# Altium PCB board.PcbDoc
Units mm, origin at the board's own origin, x right, y up, seen from the top; angles counter-clockwise.
Board outline 135 x 110 mm, 2 copper layers (Top Layer, Bottom Layer); 102 components, 97 nets, 393 pads, 98 vias.
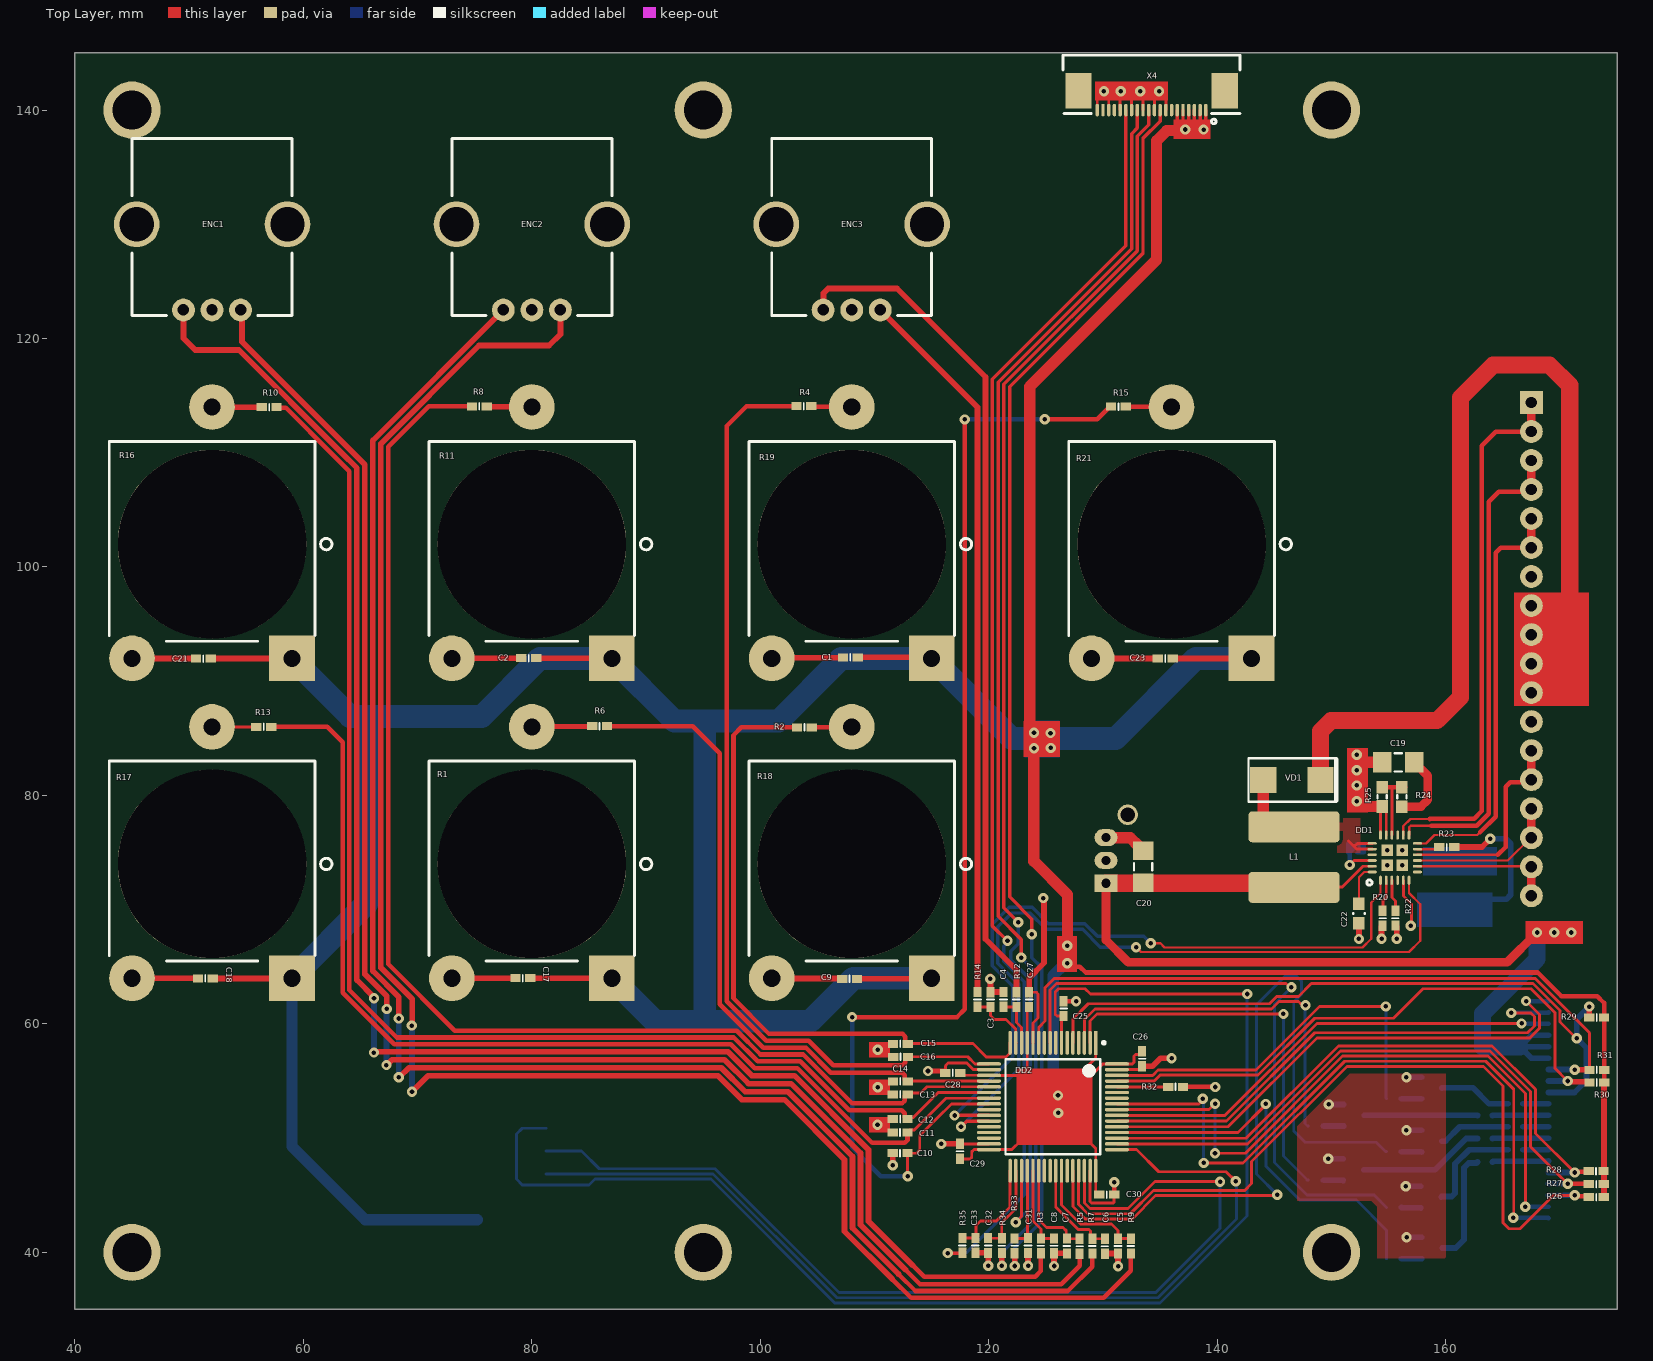
[diagram p0: Top Layer view]
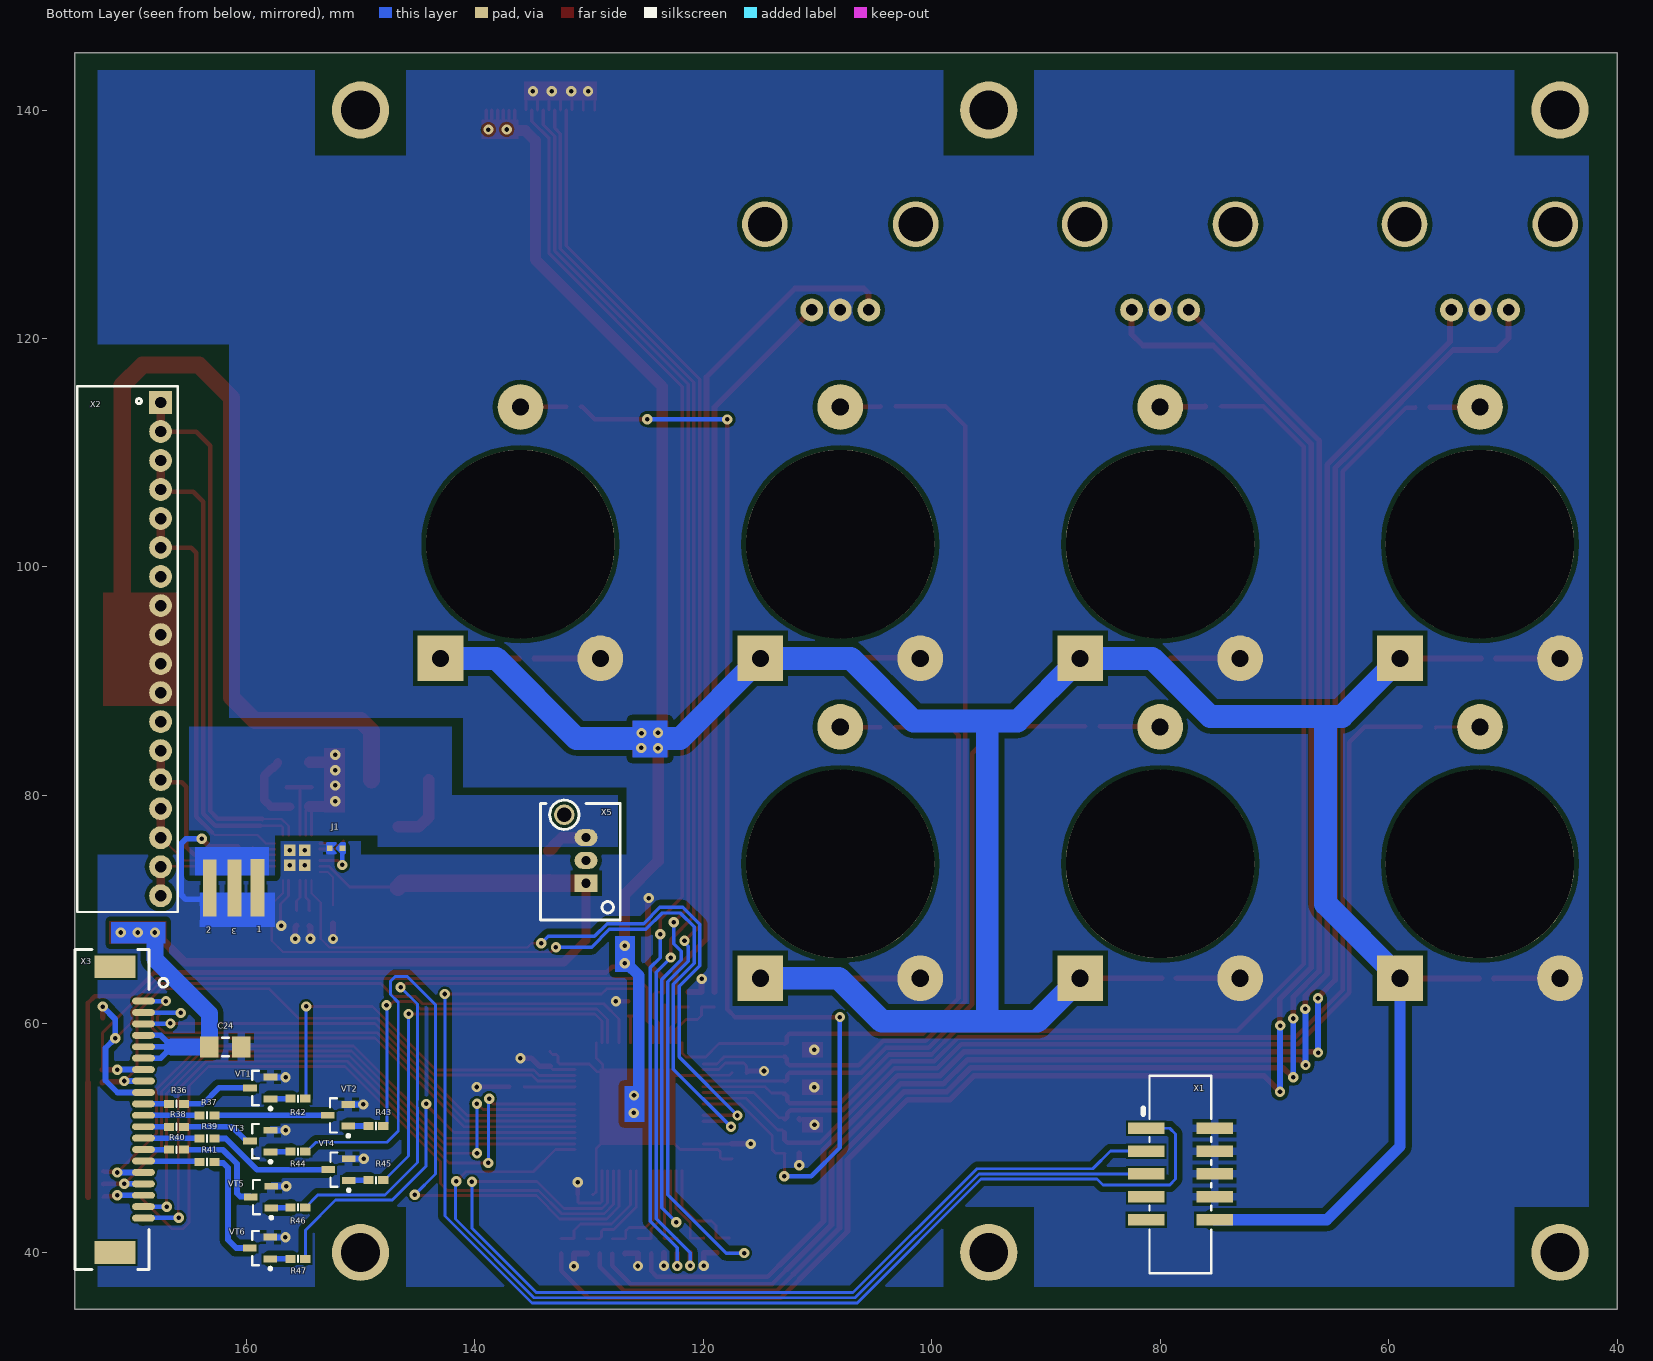
[diagram p1: Bottom Layer view, seen from below]

## Layer stack, top to bottom
Top Solder: solder mask 0.0102, Solder Resist, Dk 3.5
Top Layer: signal copper 0.0356
Dielectric 1: dielectric 0.32, FR-4, Dk 4.8
Bottom Layer: signal copper 0.0356
Bottom Solder: solder mask 0.0102, Solder Resist, Dk 3.5

## Board outline
40,35 175,35 175,145 40,145

## Design rules (kind name [scope] priority, off if disabled: settings)
Clearance Clearance_1 [InComponent('J1')] p1: gap=0.1 ignorepadtopadclearanceinfootprint=FALSE
Clearance [All] p2: gap=0.2 ignorepadtopadclearanceinfootprint=FALSE except(0: Arc-Hole Track-Hole SMDPad-Hole THPad-Hole Via-Hole Fill-Hole Poly-Hole Region-Hole Text-Hole; 0.4: THPad-Poly; 0.5: Track-Poly Fill-Poly Poly-Poly)
ComponentClearance [All] p1: gap=0.6 collisioncheckmode=3 verticalgap=0.254 showdistances=FALSE
Height [All] p1: minheight=0 maxheight=50 prefheight=30.7
HoleSize [All] p1: absolutevalues=TRUE maxlimit=20 minlimit=0.2 maxpercent=80.000 minpercent=20.000
HoleToHoleClearance [All] p1: gap=0.5 allowstackedmicrovias=TRUE
MinimumSolderMaskSliver [All] p1: minsoldermaskwidth=0.1
PlaneClearance [All] p1: clearance=0.3
PlaneConnect [All] p1: planeconnectstyle=Relief reliefexpansion=0.5 reliefentries=4 reliefconductorwidth=0.4 reliefairgap=0.3
PolygonConnect PolygonConnect_1 [All vs IsVia or IsPadHoleValid] p1: connectstyle=Direct reliefconductorwidth=0.254 reliefentries=4 polygonreliefangle="90 Angle" airgapwidth=0.254
PolygonConnect [All] p2: connectstyle=Relief reliefconductorwidth=0.7 reliefentries=4 polygonreliefangle="90 Angle" airgapwidth=0.3
RoutingCorners [All] p1: cornerstyle=45-Degree minsetback=2 maxsetback=2
RoutingVias [All] p1: holewidth=0.3 width=0.7 viastyle="Through Hole" minholewidth=0.3 minwidth=0.7 maxholewidth=1 maxwidth=2
SilkToSilkClearance [All] p1: silktosilkclearance=0.1
SilkToSolderMaskClearance [IsPad] p1: minsilkscreentomaskgap=0.05 clearancetoexposedcopper=TRUE
SolderMaskExpansion [All] p1: expansion=0.05 istentingtop=FALSE
Width [All] p1: maxlimit=3 minlimit=0.2 preferedwidth=0.3
20 further rules are at their usual default settings.

## Components (designator, comment, footprint, x,y, rotation, side; value= is the part's Value field where it differs from the comment)
1 "Wire Bridge" "Bridge 1.2mm" 159.02,73.17 r270 bottom net-tie
2 "Wire Bridge" "Bridge 1.2mm" 163.21,73.15 r270 bottom net-tie
3 "Wire Bridge" "Bridge 1.2mm" 161.03,73.16 r270 bottom net-tie
C1 "Cap" C0402 107.88,92.09 r0 top value=0.1
C2 "Cap" C0402 79.73,92.02 r0 top value=0.1
C3 "Cap" C0402 120.15,62.13 r90 top value=0.1
C4 "Cap" C0402 121.29,62.14 r90 top value=0.1
C5 "Cap" C0402 131.31,40.55 r270 top value=0.1
C6 "Cap" C0402 130.17,40.54 r270 top value=0.1
C7 "Cap" C0402 126.84,40.56 r270 top value=0.1
C8 "Cap" C0402 125.71,40.57 r270 top value=0.1
C9 "Cap" C0402 107.81,63.95 r0 top value=0.1
C10 "Cap" C0402 112.233,48.681 r180 top value=0.1
C11 "Cap" C0402 112.233,50.491 r180 top value=0.1
C12 "Cap" C0402 112.243,51.673 r180 top value=0.1
C13 "Cap" C0402 112.253,53.841 r180 top value=0.1
C14 "Cap" C0402 112.26,54.968 r180 top value=0.1
C15 "Cap" C0402 112.28,57.12 r180 top value=0.1
C16 "Cap" C0402 112.26,58.25 r180 top value=0.1
C17 "Cap" C0402 79.21,64 r0 top value=0.1
C18 "Cap" C0402 51.42,63.98 r0 top value=0.1
C19 "Cap" C1206 155.85,82.9 r180 top value=10
C20 "Cap" C1206 133.52,73.76 r270 top value=10
C21 "Cap" C0402 51.24,91.98 r0 top value=0.1
C22 "Cap" C0603 152.402,69.667 r180 top value=1
C23 "Cap" C0402 135.45,91.99 r0 top value=0.1
C24 "Cap" C1206 161.83,57.98 r0 bottom value=10
C25 "Cap" C0402 126.558,61.34 r270 top value=0.1
C26 "Cap" C0402 133.42,56.95 r270 top value=4.7
C27 "Cap" C0402 123.54,62.13 r90 top value=0.1
C28 "Cap" C0402 116.85,55.71 r180 top value=0.1
C29 "Cap" C0402 117.48,48.854 r90 top value=0.1
C30 "Cap" C0402 130.324,45.051 r0 top value=0.1
C31 "Cap" C0402 123.43,40.6 r270 top value=560pF
C32 "Cap" C0402 119.95,40.6 r270 top value=560pF
C33 "Cap" C0402 118.82,40.61 r270 top value=560pF
DD1 "WLED Boost" WQFN-24 154.29,72.575 r90 top
DD2 "STM32F072Rx" LQFP64_M 125.618,52.746 r270 top locked
ENC1 "PEC11R" PEC11R 52,122.5 r0 top locked
ENC2 "PEC11R" PEC11R 80,122.5 r0 top locked
ENC3 "PEC11R" PEC11R 108,122.5 r0 top locked
J1 "JumperB" SM/JUMPER_SHORT 152.777,75.382 r180 bottom
L1 "IND2" SDR0805 146.72,74.6 r90 top value="10uH 2A"
R1 "Res" P16NP_16mm 87,64 r90 top locked
R2 "Res" R0402 103.86,85.96 r180 top value=10K
R3 "Res" R0402 124.56,40.57 r90 top value=10K
R4 "Res" R0402 103.81,114.08 r180 top value=10K
R5 "Res" R0402 127.96,40.54 r90 top value=10K
R6 "Res" R0402 85.93,86.07 r0 top value=10K
R7 "Res" R0402 129.06,40.55 r90 top value=10K
R8 "Res" R0402 75.4,114.06 r180 top value=10K
R9 "Res" R0402 132.44,40.55 r90 top value=10K
R10 "Res" R0402 57,113.99 r0 top value=10K
R11 "Res" P16NP_16mm 87,92 r90 top locked
R12 "Res" R0402 122.42,62.13 r270 top value=10K
R13 "Res" R0402 56.529,86.01 r0 top value=10K
R14 "Res" R0402 119.014,62.14 r270 top value=10K
R15 "Res" R0402 131.35,114.03 r180 top value=10K
R16 "Res" P16NP_16mm 59,92 r90 top locked
R17 "Res" P16NP_16mm 59,64 r90 top locked
R18 "Res" P16NP_16mm 115,64 r90 top locked
R19 "Res" P16NP_16mm 115,92 r90 top locked
R20 "Res" R0402 154.48,69.25 r90 top value=400K
R21 "Res" P16NP_16mm 143,92 r90 top locked
R22 "Res" R0402 155.6,69.26 r90 top value=150К
R23 "Res" R0402 160.088,75.478 r180 top value=60К
R24 "Res" R0603 156.167,79.874 r0 top value=1M
R25 "Res" R0603 154.425,79.88 r0 top value=54.9K
R26 "Res" R0402 173.18,44.83 r0 top value=1K
R27 "Res" R0402 173.18,45.98 r0 top value=1K
R28 "Res" R0402 173.16,47.11 r0 top value=1K
R29 "Res" R0402 173.21,60.56 r0 top value=1K
R30 "Res" R0402 173.233,54.872 r0 top value=1K
R31 "Res" R0402 173.233,55.985 r0 top value=1K
R32 "Res" R0402 136.348,54.486 r0 top value=10K
R33 "Res" R0402 122.27,40.57 r270 top value=49.9
R34 "Res" R0402 121.14,40.59 r270 top value=49.9
R35 "Res" R0402 117.69,40.61 r270 top value=49.9
R36 "Res" R0402 166.11,53 r0 bottom value=510
R37 "Res" R0402 163.44,51.99 r0 bottom value=510
R38 "Res" R0402 166.11,50.99 r0 bottom value=510
R39 "Res" R0402 163.44,49.97 r0 bottom value=510
R40 "Res" R0402 166.11,48.99 r0 bottom value=510
R41 "Res" R0402 163.44,47.91 r0 bottom value=510
R42 "Res" R0402 155.48,53.45 r0 bottom value=10K
R43 "Res" R0402 148.65,51.06 r0 bottom value=10K
R44 "Res" R0402 155.48,48.82 r0 bottom value=10K
R45 "Res" R0402 148.65,46.32 r0 bottom value=10K
R46 "Res" R0402 155.48,43.94 r0 bottom value=10K
R47 "Res" R0402 155.48,39.44 r0 bottom value=10K
VD1 "Diode" DI-SMB 146.53,81.36 r270 top
VT1 "Transistor NPN" SOT23-3L 158.78,54.39 r0 bottom
VT2 "Transistor NPN" SOT23-3L 151.97,52 r0 bottom
VT3 "Transistor NPN" SOT23-3L 158.78,49.74 r0 bottom
VT4 "Transistor NPN" SOT23-3L 151.93,47.24 r0 bottom
VT5 "Transistor NPN" SOT23-3L 158.71,44.84 r0 bottom
VT6 "Transistor NPN" SOT23-3L 158.79,40.38 r0 bottom
X1 "IDC" IDC2-10MS-SMD 78.23,46.87 r90 bottom
X2 "18-pin Out" PLS-18R 167.5,114.4 r270 bottom locked
X3 "FPC" "FPC-20 TE 2-84953-0" 169,43 r90 bottom locked
X4 "FPC" "FPC-20 TE 2-1734592-0" 139,140 r0 top locked
X5 "MicroClaps" "MicroClaspSingle - 3Pin" 130.26,72.31 r90 bottom

## Footprints (in the part's own frame and the unit in brackets; to place one, negate y for a bottom-side part, rotate by r counter-clockwise, add the part's x,y. Pads: shape width x height; smd on the part's side, far side on the other; paste and mask are expansions set on the pad)
"Bridge 1.2mm" [mm]
  rect 2.5x1.2 smd: 1(0,0) 2(2.5,0)
C0402 [mm] "Chip Capacitor; Body 1.0 x 0.5 mm (LxW typ)"
  rect 0.9x0.7 smd: 1(-0.65,0) 2(0.65,0)
  silkscreen extent 0,-0.3 0,0.3, body extent -0.51,-0.26 0.51,0.26, height 0.36
C0603 [mm]
  rect 1x1.1 smd: 1(0,0.85) 2(0,-0.85)
  silkscreen extent -0.5,-0.03 0.5,0.03, body extent -0.45,-0.8 0.45,0.8, height 0.8
C1206 [mm]
  rect 1.6x1.8 smd: 1(-1.4,0) 2(1.4,0)
  silkscreen extent -0.3,-0.8 0.3,0.8, body extent -1.7,-0.8 1.5,0.8, height 1.3
DI-SMB [mm]
  rect 2.3x2.3 smd: 1(0,-2.5) 2(0,2.5)
  silkscreen extent -1.9,-3.8 1.9,3.9, body extent -1.9,-2.8 1.9,2.8, height 2.4
"FPC-20 TE 2-84953-0" [mm] "Pitch 1mm Angle FPC with slider ZIF TOP CONTACT"
  oval 0.6x2 smd: 1(19,0) 2(18,0) 3(17,0) 4(16,0) 5(15,0) 6(14,0) 7(13,0) 8(12,0) 9(11,0) 10(10,0) 11(9,0) 12(8,0) 13(7,0) 14(6,0) 15(5,0) 16(4,0) 17(3,0) 18(2,0) 19(1,0) 20(0,0)
  rect 2x3.6 smd: NC(-3,2.5) NC(22,2.5)
  silkscreen extent -4.5,-2.14 23.5,6, body extent -4.46,-0.51 23.46,6.04, height 2.56
"FPC-20 TE 2-1734592-0" [mm] "0.5mm Pitch"
  oval 0.3x1.1 smd mask+0.05: 1(0,0) 2(-0.5,0) 3(-1,0) 4(-1.5,0) 5(-2,0) 6(-2.5,0) 7(-3,0) 8(-3.5,0) 9(-4,0) 10(-4.5,0) 11(-5,0) 12(-5.5,0) 13(-6,0) 14(-6.5,0) 15(-7,0) 16(-7.5,0) 17(-8,0) 18(-8.5,0) 19(-9,0) 20(-9.5,0)
  rect 2.3x3.1 smd mask+0.05: nc(-11.15,1.7) nc(1.65,1.7)
  silkscreen extent -12.5,-1.2 3,4.8, body extent -12.45,-0.37 2.98,4.73, height 2.02
IDC2-10MS-SMD [mm]
  rect 1x3.2 smd: 1(4,3) 2(4,-3) 3(2,3) 4(2,-3) 5(0,3) 6(0,-3) 7(-2,3) 8(-2,-3) 9(-4,3) 10(-4,-3)
  silkscreen extent -8.7,-2.7 8.6,3.25, body extent -8.62,-3.75 8.63,3.75, height 8.25
LQFP64_M [mm] "Thin QFP, 64-Leads, Body 10x10mm, Pitch 0.5mm, IPC Low Density"
  rect 2.1x0.3 smd mask+0.05: 1(-5.6,3.75)
  oval 2.1x0.3 smd mask+0.05: 2(-5.6,3.25) 3(-5.6,2.75) 4(-5.6,2.25) 5(-5.6,1.75) 6(-5.6,1.25) 7(-5.6,0.75) 8(-5.6,0.25) 9(-5.6,-0.25) 10(-5.6,-0.75) 11(-5.6,-1.25) 12(-5.6,-1.75) 13(-5.6,-2.25) 14(-5.6,-2.75) 15(-5.6,-3.25) 16(-5.6,-3.75) 33(5.6,-3.75) 34(5.6,-3.25) 35(5.6,-2.75) 36(5.6,-2.25) 37(5.6,-1.75) 38(5.6,-1.25) 39(5.6,-0.75) 40(5.6,-0.25) 41(5.6,0.25) 42(5.6,0.75) 43(5.6,1.25) 44(5.6,1.75) 45(5.6,2.25) 46(5.6,2.75) 47(5.6,3.25) 48(5.6,3.75)
  oval 0.3x2.1 smd mask+0.05: 17(-3.75,-5.6) 18(-3.25,-5.6) 19(-2.75,-5.6) 20(-2.25,-5.6) 21(-1.75,-5.6) 22(-1.25,-5.6) 23(-0.75,-5.6) 24(-0.25,-5.6) 25(0.25,-5.6) 26(0.75,-5.6) 27(1.25,-5.6) 28(1.75,-5.6) 29(2.25,-5.6) 30(2.75,-5.6) 31(3.25,-5.6) 32(3.75,-5.6) 49(3.75,5.6) 50(3.25,5.6) 51(2.75,5.6) 52(2.25,5.6) 53(1.75,5.6) 54(1.25,5.6) 55(0.75,5.6) 56(0.25,5.6) 57(-0.25,5.6) 58(-0.75,5.6) 59(-1.25,5.6) 60(-1.75,5.6) 61(-2.25,5.6) 62(-2.75,5.6) 63(-3.25,5.6) 64(-3.75,5.6)
  silkscreen extent -5.72,-4.15 4.15,4.58, body extent -6,-6 6,6, height 1.5
"MicroClaspSingle - 3Pin" [mm] "MicroClasp Molex PCB Connector"
  rect 1.5x2 hole 0.8: 1(0,0)
  oval 1.5x2 hole 0.8: 2(2,0) 3(4,0)
  round 1.8 hole 1.3: H(6,1.9)
  silkscreen extent -3.2,-3 7.28,4, body extent -3,-3 7,3.7, height 9.75
P16NP_16mm [mm] "Res"
  rect 4x4 hole 1.5: 1(0,0)
  round 4 hole 1.5: 2(22,7) 3(0,14)
  round 16.5 hole 16.5 unplated: NU(10,7)
  silkscreen extent 1.5,-3.5 19,16, body extent 2,-1 18,15, height 16.2
PEC11R [mm] "ENCODER"
  round 2 hole 1: 1(-2.5,0) 2(0,0) 3(2.5,0)
  round 4 hole 3: NU(-6.6,7.5) NU(6.6,7.5)
  silkscreen extent -7,-0.5 7,15, body extent -7,-0.2 7,14.7, height 26.6
PLS-18R [mm]
  rect 2x2 hole 1: 1(0,0)
  round 2 hole 1: 2(2.54,0) 3(5.08,0) 4(7.62,0) 5(10.16,0) 6(12.7,0) 7(15.24,0) 8(17.78,0) 9(20.32,0) 10(22.86,0) 11(25.4,0) 12(27.94,0) 13(30.48,0) 14(33.02,0) 15(35.56,0) 16(38.1,0) 17(40.64,0) 18(43.18,0)
  silkscreen extent -1.42,-7.3 44.6,1.5, body extent -1.27,-7.35 44.45,1.27, height 5.45
R0402 [mm] "Chip Resistor; Body 1.1 x 0.5 mm (LxW typ)"
  rect 0.9x0.7 smd: 1(-0.65,0) 2(0.65,0)
  silkscreen extent 0,-0.3 0,0.3, body extent -0.5,-0.25 0.5,0.25, height 0.4
R0603 [mm]
  rect 1x1.1 smd: 1(0,0.85) 2(0,-0.85)
  silkscreen extent -0.4,-0.15 0.4,0.15, body extent -0.4,-0.8 0.4,0.8, height 0.5
SDR0805 [mm] "SMD Power Inductors"
  rrect25% 2.7x8 smd: 1(-2.65,0) 2(2.65,0)
  body extent -3.68,-3.75 3.68,3.75, height 5.05
SM/JUMPER_SHORT [mil] "Перемычка на плате"
  rect 20x20 smd: 1(3.12,0) 2(46.75,0)
  Top Layer region: 25.96,19.73 27.23,16.67 25.96,13.61 12.36,0 25.96,-13.61 27.23,-16.67 25.96,-19.73 22.9,-21 -4.17,-21 -7.23,-19.73 -8.5,-16.67 -8.5,16.67 -7.23,19.73 -4.17,21 22.9,21
  Top Layer region: 57.23,19.73 58.5,16.67 58.5,-16.67 57.23,-19.73 54.17,-21 44.72,-21 41.66,-19.73 24.99,-3.06 23.72,0 24.99,3.06 41.66,19.73 44.72,21 54.17,21
SOT23-3L [mm] "SOT23, 3-Leads, Body 2.9x1.3mm, Pitch 0.95mm, Lead Span 2.5mm, IPC High Density"
  rect 1.2x0.6 smd: 1(-0.9,0.95) 2(-0.9,-0.95) 3(0.9,0)
  silkscreen extent -1.02,-1.5 0.7,1.92, body extent -1.15,-1.5 1.15,1.5, height 1.1
WQFN-24 [mm]
  oval 0.8x0.23 smd mask+0.07: 1(0,0) 2(0,-0.5) 3(0,-1) 4(0,-1.5) 5(0,-2) 6(0,-2.5) 13(3.95,-2.5) 14(3.95,-2) 15(3.95,-1.5) 16(3.95,-1) 17(3.95,-0.5) 18(3.95,0)
  oval 0.23x0.8 smd mask+0.07: 7(0.725,-3.225) 8(1.225,-3.225) 9(1.725,-3.225) 10(2.225,-3.225) 11(2.725,-3.225) 12(3.225,-3.225) 19(3.225,0.725) 20(2.725,0.725) 21(2.225,0.725) 22(1.725,0.725) 23(1.225,0.725) 24(0.725,0.725)
  rect 1x1 hole 0.4: TP(1.325,-0.6) TP(1.325,-1.9) TP(2.625,-1.9) TP(2.625,-0.6)
  silkscreen extent -0.43,0.74 0.03,1.2, body extent -0.04,-3.26 3.99,0.76, height 0.8

## Part data
C1 C2 C3 C4 C5 C6 C7 C8 C9 C10 C11 C12 C13 C14 C15 C16 C17 C18 C21 C23 C25 C27 C28 C29 C30 C31 C32 C33: "Capacitor", Voltage=16
C19 C20 C24: "Capacitor", Voltage=25
C22 C26: "Capacitor", Voltage=6.3
DD1: library part TPS61185, FP=WQFN-24, Type=NU
DD2: "STM32 ARM-based 32-bit MCU, up to 128 KB Flash, crystal-less USB  FS 2.0, CAN, 12 timers, ADC, DAC & comm. interfaces, 2.0 - 3.6 V", FP=LQFP64, Type=STM32F072R8T6
ENC1 ENC2 ENC3: library part "PEC11R ENCODER", "ENCODER"
J1: "Jumper on Board"
L1: "Inductor"
R1 R11 R16 R17 R18 R19 R21: library part "P16A Res", "Potenciometr"
R2 R3 R4 R5 R6 R7 R8 R9 R10 R12 R13 R14 R15 R20 R22 R23 R24 R25 R26 R27 R28 R29 R30 R31 R32 R33 R34 R35 R36 R37 R38 R39 R40 R41 R42 R43 R44 R45 R46 R47: "Resistor"
VT1 VT2 VT3 VT4 VT5 VT6: library part "Trans NPN", "NPN transistor", FP=SOT-23-3, Type=BC817-40
X1: library part IDC2-10, "IDC 2mm 10 pin"
X2: "18-pin Out Connector", Type=PLS-18R
X3: library part "FPC-20pin 1mm", "FPC 20pin 1mm"
X4: library part "FPC-20pin 0.5mm", "FPC 20pin 0.5mm", Type=2-1734592-0
X5: library part MicroClapsSingle-3, "MicroClapsConnector 3Pin SingleLine"
VD1: FP=SMB, Type=10BQ040

## Free pads (board coordinates)
  round 5 hole 3.4: H(45,40) H(45,140) H(95,40) H(95,140) H(150,40) H(150,140)

## Via types
v1: diameter 0.9, hole 0.4, Top Layer to Bottom Layer, tented both sides, 98 vias

## Nets (pads, with @x,y where several pads share a name; then routed paths per layer and width w, separated by ;. In a path a pad name is that pad's centre, name@x,y a point inside that pad or via, vN(x,y) a via of type N, cw(c..) or ccw(c..) an arc to the next point about the centre after c; other vN are vias at no path point)
AIN0: C16.1 DD2.16 R2.2 | length 56.6
  Top Layer w0.25: C16.1 112.94,58.28 118.61,58.28 119.78,57.11 121.518,57.11 121.868,57.46 DD2.16
  Top Layer w0.4: R2.2 98.34,85.96 97.65,85.27 97.65,62.23 100.76,59.12 112.463,59.12 112.697,58.886 112.697,58.4 112.847,58.25 C16.1
AIN0_RAW: R2.1 R18.2 | length 3.5
  Top Layer w0.4: R2.1 104.53,85.98 107.98,85.98 R18.2
AIN1: C15.1 DD2.17 R4.2 | length 83.3
  Top Layer w0.25: C15.1 118.16,57.12 118.784,56.496 DD2.17
  Top Layer w0.4: R4.2 98.79,114.08 97.05,112.34 97.05,61.981 100.511,58.52 104.244,58.52 106.394,56.37 112.445,56.37 112.68,56.605 112.68,56.97 112.83,57.12 C15.1
AIN1_RAW: R4.1 R19.2 | length 3.6
  Top Layer w0.4: R4.1 104.5,114.04 107.96,114.04 R19.2
AIN2: C14.1 DD2.20 R6.2 | length 59.3
  Top Layer w0.25: C14.1@112.994,55.006 120.008,55.006 DD2.20
  Top Layer w0.4: R6.2 94.07,86.07 96.45,83.69 96.45,61.733 100.263,57.92 103.996,57.92 106.176,55.74 112.426,55.74 112.66,55.506 112.66,55.118 112.81,54.968 C14.1
AIN2_RAW: R1.2 R6.1 | length 5.3
  Top Layer w0.4: R1.2 80.035,86.035 85.245,86.035 R6.1
AIN3: C13.1 DD2.21 R8.2 | length 112.6
  Top Layer w0.25: R8.2@74.65,114.06 R8.2 ; C13.1@112.803,53.951 114.031,53.951 114.576,54.496 DD2.21
  Top Layer w0.4: R8.2@74.65,114.06 70.969,114.06 67.43,110.521 67.43,65.242 73.262,59.41 97.924,59.41 100.014,57.32 103.747,57.32 108.032,53.035 112.406,53.035 112.653,53.282 112.653,53.691 112.803,53.841 C13.1
AIN3_RAW: R8.1 R11.2 | length 4
  Top Layer w0.5: R8.1 76.08,114.03 79.97,114.03 R11.2
AIN4: C12.1 DD2.22 R10.2 | length 115.9
  Top Layer w0.25: C12.1@112.864,51.787 113.367,51.787 115.576,53.996 DD2.22
  Top Layer w0.4: R10.2 57.684,113.956 58.465,113.956 62.67,109.751 64.03,108.391 64.03,62.969 68.189,58.81 97.676,58.81 99.766,56.72 103.499,56.72 107.783,52.435 112.383,52.435 112.643,52.176 112.643,51.823 112.793,51.673 C12.1
AIN4_RAW: R10.1 R16.2 | length 4.4
  Top Layer w0.5: R16.2 52.005,113.995 56.345,113.995 R10.1
AIN5: C11.1 DD2.23 R13.2 | length 92.7
  Top Layer w0.25: C11.1@112.9,50.563 113.052,50.716 113.476,50.716 116.256,53.496 DD2.23
  Top Layer w0.4: R13.2 62.08,86.01 63.43,84.66 63.43,62.72 67.94,58.21 97.427,58.21 99.517,56.12 103.25,56.12 109.78,49.59 112.649,49.59 112.883,49.824 C11.1
AIN5_RAW: R13.1 R17.2 | length 4.1
  Top Layer w0.25: R17.2@52.07,85.93 R17.2 52.005,86.005 55.874,86.005 R13.1 ; R13.1@55.81,85.93 R13.1@55.88,85.86
AIN6: C10.1 DD2.24 R15.2 | length 104.2
  Top Layer w0.25: C10.1@112.853,48.651 C10.1 ; v1(112.894,46.653) 112.894,48.626 112.861,48.659 C10.1 ; DD2.24 116.726,52.996 115.49,51.76 113.96,50.23 113.96,48.98 113.661,48.681 C10.1
  Top Layer w0.4: v1(108.03,60.6) 117.22,60.6 117.9,61.28 117.9,112.9 v1@117.87,112.93 ; v1(124.91,112.94) 129.51,112.94 130.6,114.03 R15.2
  Bottom Layer w0.4: v1(108.03,60.6) 108.03,49.18 110.557,46.653 v1(112.894,46.653) ; v1(117.885,112.915) 117.91,112.94 v1(124.91,112.94)
AIN6_RAW: R15.1 R21.2 | length 4
  Top Layer w0.4: R15.1 132.015,114.015 135.985,114.015 R21.2
AIN7: DD2.25
COLL_A: DD2.45 R26.1 X3.18 | length 70.9
  Top Layer w0.25: DD2.45 127.868,44.181 128.593,43.457 128.596,43.457 128.673,43.38 132.38,43.38 134.419,45.419 142.411,45.419 143.01,46.017 143.01,47.944 151.346,56.28 163.32,56.28 165.027,54.573 165.027,42.595 165.552,42.07 166.49,42.07 169.41,44.99 v1(171.29,44.99) v1@171.37,44.91 ; R26.1@172.45,44.91 R26.1
  Top Layer w0.4: v1@171.37,44.91 R26.1@172.45,44.91
  Bottom Layer w0.5: X3.18 v1@171.28,45
COLL_B: DD2.50 R27.1 X3.17 | length 54
  Top Layer w0.25: DD2.50 142.653,49.496 150.786,57.63 163.879,57.63 167.423,54.086 167.423,49.253 v1(170.674,46.001)
  Top Layer w0.4: v1(170.674,46.001) 170.685,45.991 172.519,45.991 R27.1
  Bottom Layer w0.5: X3.17 v1@170.674,46
COLL_C: DD2.51 R28.1 X3.16 | length 53.8
  Top Layer w0.25: DD2.51 142.516,49.996 150.6,58.08 164.066,58.08 167.873,54.273 167.873,50.407 v1(171.29,46.99)
  Top Layer w0.4: v1(171.29,46.99) 171.35,47.05 172.45,47.05 R28.1
  Bottom Layer w0.5: X3.16 v1@171.28,47
COLL_D: DD2.5 R29.1 X3.9 | length 61.8
  Top Layer w0.25: DD2.5 127.368,60.428 128.7,61.76 144.564,61.76 145.214,62.41 147.117,62.41 148.235,63.528 167.646,63.528 170.004,61.17 170.004,60.166 v1@171.32,58.85
  Top Layer w0.5: R29.1 172.56,61.51 v1(172.57,61.52)
  Bottom Layer w0.5: X3.9 171.28,54 172.32,55.04 172.32,57.888 v1(171.465,58.742) 171.465,60.415 v1(172.57,61.52)
COLL_E: DD2.61 R30.1 X3.8 | length 52.6
  Top Layer w0.25: DD2.61 134.486,54.996 135.013,55.523 143.567,55.523 148.534,60.49 155.43,60.49 158.018,63.078 167.459,63.078 169.554,60.984 169.554,56.122 v1(170.674,55.001)
  Top Layer w0.5: v1(170.674,55.001) 170.739,54.937 172.519,54.937 R30.1
  Bottom Layer w0.5: X3.8 v1(170.674,55.001)
COLL_F: DD2.11 R31.1 X3.7 | length 61.7
  Top Layer w0.25: DD2.11 124.378,58.356 124.378,59.7 124.918,60.24 124.918,63.165 125.731,63.978 167.832,63.978 172.591,59.219 R31.1@172.591,56.143
  Top Layer w0.5: v1(171.29,55.99) 171.292,55.988 172.581,55.988 R31.1
  Bottom Layer w0.5: X3.7 171.28,56 v1(171.29,55.99)
EN_BACKLITE: DD1.1 DD2.26 | length 63.6
  Top Layer w0.2: v1(134.185,67.051) 135.026,67.051 135.387,66.69 152.712,66.69 153.476,67.455 153.476,70.622 154.29,71.436 DD1.1
  Top Layer w0.3: v1@117.02,51.99 117.026,51.996 DD2.26
  Bottom Layer w0.3: v1@117.006,52 122.11,57.104 122.11,63.279 120.3,65.089 120.3,68.706 121.8,70.206 123.789,70.206 125.22,68.776 128.418,68.776 129.519,67.675 133.549,67.675 134.173,67.051 v1(134.185,67.051)
  other v1: 117.006,51.98
GND: 1.2 2.2 3.2 C1.1 C2.1 C3.2 C4.2 C5.2 C6.2 C7.2 C8.2 C9.1 C10.2 C11.2 C12.2 C13.2 C14.2 C15.2 C16.2 C17.1 C18.1 C21.1 C22.1 C23.1 C24.1 C25.1 C26.2 C27.2 C28.2 C29.2 C30.2 C31.2 C32.2 C33.2 DD1.5 DD1.TP DD2.12 DD2.18 DD2.31 DD2.47 DD2.63 ENC1.2 ENC2.2 ENC3.2 J1.1 R1.3 R11.3 R16.3 R17.3 R18.3 R19.3 R20.1 R21.3 R22.1 R23.1 R32.2 VT1.2 VT2.2 VT3.2 VT4.2 VT5.2 VT6.2 X1.2 X1.4 X1.6 X1.8 X4.8 X4.10 X4.12 X4.14 X4.16 X4.18 X4.20 | length 130.6
  Top Layer w0.25: C28.2@116.2,55.86 116.2,56.33 116.44,56.57 118.07,56.57 118.644,55.996 DD2.18 ; C29.2@117.7,49.52 117.724,49.496 DD2.31 ; C27.2 123.546,62.774 124.164,62.774 124.31,62.628 124.31,60.53 123.868,60.088 DD2.12 ; v1(127.64,61.99) v1@127.66,61.97 ; DD2.47 128.868,44.466 129.014,44.32 130.92,44.32 130.974,44.374 C30.2 ; X4.20 129.5,141.29 129.53,141.32 ; X4.18 130.5,141.13 130.52,141.15 ; v1@130.97,46.13 v1@130.974,46.126 ; DD2.63 133.195,55.996 133.418,56.219 C26.2@133.418,56.336 ; X4.16 131.5,141.13 131.55,141.18 ; 132.49,141.23 132.5,141.22 X4.14 ; 133.43,141.22 133.5,141.15 X4.12 ; X4.10 134.5,140.955 134.725,141.18 135.42,141.18 135.5,141.1 X4.8 ; v1@139.824,54.486 v1@139.83,54.48 ; DD1.5 156.29,71.21 157,70.5 157,68.648 v1(156.94,68.588)
  Top Layer w0.4: v1(114.678,55.879) 116.031,55.879 C28.2 ; C25.1 v1(127.64,61.99) ; C30.2 v1@130.974,46.126 ; R32.2 v1@139.824,54.486
  Top Layer w0.5: R17.3 45.01,63.99 50.76,63.99 C18.1 ; R16.3 45.01,91.99 50.58,91.99 C21.1 ; R1.3 C17.1 ; R11.3 73.01,92.01 79.07,92.01 C2.1 ; R18.3 101.025,63.975 107.135,63.975 C9.1 ; R19.3 101.045,92.045 107.185,92.045 C1.1 ; C12.2@111.551,51.631 C12.2 ; C10.2 v1(111.583,47.627) v1@111.59,47.62 ; v1@115.84,49.49 115.854,49.504 C29.2 ; C33.2 118.825,39.955 119.945,39.955 C32.2 v1@119.95,38.92 ; v1@120.15,64.15 C3.2 120.155,62.785 121.285,62.785 C4.2 ; v1@123.43,38.92 C31.2 ; C27.2 123.54,64.04 124.841,65.341 v1@124.841,71.019 ; v1@125.73,38.87 125.71,38.89 C8.2 125.715,39.915 126.835,39.915 C7.2 ; R21.3 129.005,91.995 134.795,91.995 C23.1 ; C6.2 130.175,39.895 131.305,39.895 C5.2 v1@131.31,38.87 ; C26.2 134.337,56.3 135.037,57 v1(136,57) ; v1(152.401,67.44) C22.1 ; v1(154.382,67.466) 154.382,68.497 154.38,68.5 R20.1 ; R22.1@155.585,68.595 R22.1 155.707,68.503 v1(155.707,67.466) ; R23.1 163.178,75.478 v1(163.9,76.2)
  Bottom Layer w0.5: v1(149.71,48.19) VT4.2 ; v1(149.75,52.95) VT2.2 ; v1(156.49,45.79) VT5.2 ; v1(156.56,50.69) VT3.2 ; v1(156.56,55.34) VT1.2 ; v1(156.57,41.33) VT6.2 ; 2.2 163.46,70.9 165.3,70.9 165.7,71.3 165.7,75.8 165.3,76.2 v1(163.9,76.2)
  other v1: 131.318,38.784 125.718,38.804 119.958,38.834 123.438,38.834 130.971,46.132 115.835,49.49 110.26,51.17 110.277,54.465 139.834,54.478 110.277,57.747 120.136,63.938 124.757,71.019 130.08,141.64 131.55,141.64 133.26,141.64 134.91,141.64
LED_BACKPAN: DD2.44 R44.1 | length 67.2
  Top Layer w0.25: DD2.44 127.368,44.007 128.445,42.93 132.566,42.93 134.605,44.969 145.24,44.969 v1@145.281,45.01
  Bottom Layer w0.25: v1(145.25,45.04) 143.425,46.865 143.425,61.676 145.402,63.653 145.91,64.16 146.956,64.16 147.384,63.732 147.384,62.579 146.7,61.895 146.7,50.613 147.673,49.64 153.91,49.64 154.73,48.82 R44.1
LED_JOY: DD2.62 R42.1 | length 34.2
  Top Layer w0.25: DD2.62 134.346,55.496 134.823,55.973 143.38,55.973 148.939,61.531 v1(154.76,61.531)
  Bottom Layer w0.25: v1(154.76,61.531) 154.76,53.52 R42.1
LED_LC: DD2.52 R47.1 | length 34.9
  Top Layer w0.25: DD2.52 141.826,50.496 v1@144.291,52.961
  Bottom Layer w0.25: v1(144.255,52.997) 144.255,47.542 147.217,44.58 152.19,44.58 154.83,41.94 R47.1
LED_LC_HOLD: DD2.2 R45.1 | length 34.6
  Top Layer w0.25: DD2.2 128.868,60.248 129.48,60.86 145.78,60.86 v1(145.795,60.875) v1@145.81,60.89
  Bottom Layer w0.25: v1(145.795,60.875) 145.795,48.425 147.675,46.545 147.9,46.32 R45.1
LED_MOTORS: DD2.3 R43.1 | length 33
  Top Layer w0.25: DD2.3 128.368,60.384 129.294,61.31 144.75,61.31 145.4,61.96 147.098,61.96 147.435,61.623 v1(147.726,61.623)
  Bottom Layer w0.25: v1(147.726,61.623) 147.679,61.576 147.679,51.285 147.904,51.06 R43.1
LED_PROFILE: DD2.4
LED_SENSE: DD2.8
LED_SHAKER: DD2.9 R46.1 | length 53.5
  Top Layer w0.25: DD2.9 125.368,62.979 125.917,63.528 146.022,63.528 146.347,63.203 v1(146.494,63.203)
  Bottom Layer w0.25: v1(146.494,63.203) 145.02,61.729 145.02,53.328 145.03,53.318 145.03,52.676 145.02,52.666 145.02,47.88 147.87,45.03 153.74,45.03 R46.1
LineA: DD1.14 X2.1 X2.2 | length 47.6
  Top Layer w0.2: DD1.14 156.29,77.32 156.91,77.94 158.6,77.94
  Top Layer w0.4: 158.6,77.94 158.61,77.95 162.483,77.95 163.17,78.637 163.17,110.62 164.38,111.83 167.47,111.83 X2.2
  Top Layer w0.75: X2.2 X2.1
LineB: DD1.13 X2.3 X2.4 | length 42.2
  Top Layer w0.2: DD1.13 156.796,76.531 156.796,77.206 156.94,77.35 158.75,77.35
  Top Layer w0.4: 158.75,77.35 162.731,77.35 163.77,78.389 163.77,105.7 164.65,106.58 167.3,106.58 X2.4
  Top Layer w0.75: X2.4 X2.3
LineC: DD1.12 X2.5 X2.6 | length 36.8
  Top Layer w0.2: DD1.12 158.28,75.8 159.01,76.53 162.76,76.53 163.03,76.8
  Top Layer w0.4: 163.03,76.8 164.37,78.14 164.37,101.25 164.81,101.69 167.49,101.69 X2.6
  Top Layer w0.75: X2.6 X2.5
LineD: DD1.10 X2.13 X2.14 | length 18.3
  Top Layer w0.2: DD1.10 164.564,74.8
  Top Layer w0.4: 164.564,74.8 165.247,75.483 165.247,80.757 165.65,81.16 167.28,81.16 X2.14
  Top Layer w0.75: X2.14 X2.13
LineE: DD1.9 X2.15 X2.16 | length 13.4
  Top Layer w0.2: DD1.9 165.44,74.3 167.44,76.3 X2.16
  Top Layer w0.75: X2.16 X2.15
LineF: DD1.8 X2.17 X2.18 | length 12.8
  Top Layer w0.2: DD1.8@157.521,73.806 DD1.8 157.521,73.794 167.466,73.794 X2.17 X2.17@167.296,73.556
  Top Layer w0.75: X2.18 X2.17
NetC19_1: C19.1 R24.2 | length 6.3
  Top Layer w0.75: R24.2 157.841,79.024 158.429,79.612 158.429,81.721 157.775,82.375 157.675,82.375 157.25,82.8 C19.1
NetC22_2: C22.2 DD1.24 | length 3.8
  Top Layer w0.2: C22.2@152.401,70.367 152.401,72.838 152.864,73.3 DD1.24
NetDD1_2: DD1.2 R20.2 | length 2.8
  Top Layer w0.25: R20.2 154.5,69.92 154.5,70.779 154.79,71.069 DD1.2
NetDD1_3: DD1.3 R22.2 | length 2.8
  Top Layer w0.2: R22.2@155.58,69.93 R22.2
  Top Layer w0.25: DD1.3 155.29,71.076 155.6,70.766 155.6,69.95 R22.2@155.58,69.93
NetDD1_11: DD1.11 R23.2 | length 2
  Top Layer w0.2: DD1.11 159.261,75.3 R23.2
NetDD1_16: DD1.16 R24.1 R25.1 | length 6.4
  Top Layer w0.25: DD1.16 155.29,80.64 155.375,80.725
  Top Layer w0.4: R25.1@154.29,80.73 154.295,80.725 155.375,80.725 156.455,80.725 R24.1@156.46,80.72
NetDD1_19: DD1.19 DD1.20 L1.2 VD1.1 | length 10.4
  Top Layer w0.25: 151.5,76 151.896,75.604 ; DD1.20 152.2,75.3 151.896,75.604 ; DD1.19 152.3,75.8 152.104,75.604 151.896,75.604
  Top Layer w1: VD1.1 144.03,78.1 144.88,77.25 L1.2
NetDD1_22: DD1.22 J1.2 | length 3.6
  Top Layer w0.25: v1(151.59,73.92) 151.97,74.3 DD1.22
  Bottom Layer w0.4: J1.2 v1(151.59,73.92) v1@151.595,73.915
NetDD2_60: DD2.60 R32.1 | length 4.5
  Top Layer w0.25: DD2.60 131.223,54.491 135.693,54.491 R32.1
NetR33_2: R33.2 X4.9 | length 109.8
  Top Layer w0.3: v1(123.755,67.86) 123.755,69.178 121.82,71.114 121.82,115.776 133.5,127.456 133.5,137.516 135,139.016 X4.9
  Top Layer w0.5: v1@122.27,38.89 R33.2
  Bottom Layer w0.3: v1(122.278,38.804) 122.278,40.391 124.623,42.735 124.623,64.937 123.755,65.805 v1(123.755,67.86)
NetR34_2: R34.2 X4.13 | length 109.9
  Top Layer w0.3: v1(122.85,65.807) 122.85,67.39 120.82,69.42 120.82,116.19 132.5,127.87 132.5,137.93 133,138.43 X4.13
  Top Layer w0.5: v1@121.14,38.91 R34.2
  Bottom Layer w0.3: v1(121.148,38.824) 121.148,39.968 124.123,42.943 124.123,64.534 v1(122.85,65.807)
NetR35_2: R35.2 X4.15 | length 111.4
  Top Layer w0.3: v1(116.4,39.941) 117.671,39.941 R35.2 ; v1(121.636,67.283) 121.606,67.283 120.32,68.569 120.32,116.45 132,128.13 X4.15
  Bottom Layer w0.3: v1(116.4,39.941) 117.991,39.941 123.11,45.06 123.11,63.693 121.3,65.503 121.3,66.807 121.636,67.143 v1(121.636,67.283)
NetR36_1: R36.1 VT1.3 | length 6.4
  Bottom Layer w0.5: VT1.3 159.7,54.41 162.38,54.41 163.79,53 R36.1
NetR36_2: R36.2 X3.10 | length 2.2
  Bottom Layer w0.5: R36.2 X3.10
NetR37_1: R37.1 VT2.3 | length 9.9
  Bottom Layer w0.5: VT2.3 152.875,51.995 162.785,51.995 R37.1
NetR37_2: R37.2 X3.11 | length 4.9
  Bottom Layer w0.5: R37.2 164.095,51.995 168.995,51.995 X3.11
NetR38_1: R38.1 VT3.3 | length 6.3
  Bottom Layer w0.5: VT3.3 159.98,49.74 161.23,50.99 R38.1
NetR38_2: R38.2 X3.12 | length 2.2
  Bottom Layer w0.5: R38.2 166.765,50.995 168.995,50.995 X3.12
NetR39_1: R39.1 VT4.3 | length 11.1
  Bottom Layer w0.5: VT4.3 159.07,47.24 161.8,49.97 R39.1
NetR39_2: R39.2 X3.13 | length 4.9
  Bottom Layer w0.5: R39.2 164.105,49.985 168.985,49.985 X3.13
NetR40_1: R40.1 VT5.3 | length 9.1
  Bottom Layer w0.5: VT5.3 159.655,44.885 160.525,44.885 160.819,45.179 160.819,47.754 162.055,48.99 R40.1
NetR40_2: R40.2 X3.14 | length 2.2
  Bottom Layer w0.5: R40.2 166.765,48.995 168.995,48.995 X3.14
NetR41_1: R41.1 VT6.3 | length 9.9
  Bottom Layer w0.5: VT6.3 160.88,40.38 161.6,41.1 161.6,47.406 162.016,47.823 162.703,47.823 R41.1
NetR41_2: R41.2 X3.15 | length 4.9
  Bottom Layer w0.5: R41.2 164.161,47.981 168.981,47.981 X3.15
NetR42_2: R42.2 VT1.1 | length 1.8
  Bottom Layer w0.5: R42.2 156.135,53.445 157.875,53.445 VT1.1
NetR43_2: R43.2 VT2.1 | length 1.8
  Bottom Layer w0.5: R43.2 149.305,51.055 151.065,51.055 VT2.1
NetR44_2: R44.2 VT3.1 | length 1.8
  Bottom Layer w0.5: R44.2 156.145,48.805 157.865,48.805 VT3.1
NetR45_2: R45.2 VT4.1 | length 1.7
  Bottom Layer w0.5: R45.2 149.315,46.305 151.015,46.305 VT4.1
NetR46_2: R46.2 VT5.1 | length 1.7
  Bottom Layer w0.5: R46.2 156.155,43.915 157.785,43.915 VT5.1
NetR47_2: R47.2 VT6.1 | length 1.8
  Bottom Layer w0.5: R47.2 156.135,39.435 157.885,39.435 VT6.1
NetVD1_2: VD1.2 X2.8 X2.9 X2.10 X2.11 | length 75.2
  Top Layer w1.5: VD1.2 149.03,85.62 149.97,86.56 159.25,86.56 161.29,88.6 161.29,114.82 164.14,117.67 169.095,117.67 170.86,115.905 170.86,96.12
PWM_BACKLITE: DD1.6 DD2.27 | length 68
  Top Layer w0.2: v1(132.893,66.715) 133.317,66.29 156.793,66.29 157.78,67.277 157.78,70.47 156.79,71.46 DD1.6
  Top Layer w0.3: v1(117.57,50.99) 118.076,51.496 DD2.27
  Bottom Layer w0.3: v1(117.57,50.99) 122.61,56.03 122.61,63.486 120.8,65.296 120.8,68.499 122.007,69.706 123.582,69.706 125.012,68.276 128.211,68.276 129.772,66.715 v1(132.893,66.715)
PWR_GND: 1.1 2.1 3.1 C19.2 C20.1 DD1.17 DD1.18 R25.2 X5.3 | length 13.6
  Top Layer w0.25: DD1.18 154.29,78.895 R25.2 154.79,78.665 DD1.17
  Top Layer w1: X5.3 132.37,76.31 133.12,75.56 133.12,75.46 133.42,75.16 C20.1 ; v1@152.19,79.55 152.71,79.03 R25.2 ; 152.39,83.08 152.57,82.9 C19.2
  other v1: 152.219,79.493 152.219,80.877 152.219,82.204 152.219,83.562
RESET: C25.2 DD2.7 X1.1 | length 120.5
  Top Layer w0.25: DD2.7 126.378,58.356 126.378,60.538 C25.2@126.53,60.69 ; C25.2 C25.2@126.53,60.69 ; v1@142.63,62.61 v1(142.62,62.62) 128.89,62.62 128.432,63.078 126.103,63.078 125.818,62.793 125.818,60.836 125.964,60.69 C25.2@126.53,60.69
  Bottom Layer w0.25: X1.1 79.16,50.87 78.65,50.36 78.65,46.41 79.16,45.9 85.01,45.9 85.53,46.42 95.674,46.42 106.514,35.58 134.986,35.58 142.591,43.185 142.591,62.591 v1(142.62,62.62)
ROW_A: DD2.53 X3.1 | length 45.4
  Top Layer w0.25: DD2.53 140.949,50.996 148.723,58.77 167.356,58.77 168.21,59.624 168.21,60.826 167.04,61.997 v1(167.037,61.997)
  Bottom Layer w0.4: v1(167.037,61.997) 167.038,61.998 X3.1 X3.1
ROW_B: DD2.54 X3.2 | length 46.3
  Top Layer w0.25: DD2.54 140.813,51.496 148.536,59.22 167.17,59.22 167.76,59.81 167.76,60.64 167.44,60.96 v1(165.73,60.96)
  Bottom Layer w0.4: v1(165.73,60.96) 165.75,60.98 168.98,60.98 X3.2
ROW_C: DD2.55 X3.3 | length 41.1
  Top Layer w0.25: DD2.55 140.676,51.996 148.72,60.04 v1(166.64,60.04)
  Bottom Layer w0.4: v1(166.64,60.04) 166.66,60.02 168.98,60.02 X3.3
ROW_D: DD2.56 X3.19 | length 57.1
  Top Layer w0.25: DD2.56 139.286,52.496 v1(139.81,53.02) ; v1(139.8,48.68) 142.473,48.68 150.973,57.18 163.693,57.18 166.973,53.9 v1(166.973,44.005)
  Bottom Layer w0.25: v1(139.8,48.68) 139.8,53.01 v1(139.81,53.02)
  Bottom Layer w0.4: v1(166.973,44.005) 166.975,44.003 168.997,44.003 X3.19
ROW_E: DD2.57 X3.20 | length 59.7
  Top Layer w0.25: DD2.57 138.396,52.996 v1@138.82,53.42 ; v1(138.827,47.833) 142.262,47.833 151.159,56.73 163.506,56.73 165.95,54.286 165.95,43.21 v1@165.98,43.18
  Bottom Layer w0.25: v1(138.732,53.454) 138.79,53.396 v1@138.79,47.61
  Bottom Layer w0.4: v1(165.922,43.032) 165.938,43.016 168.984,43.016 X3.20
ROW_F: DD2.10
SPI_MISO: DD2.35 X4.11 | length 109.4
  Top Layer w0.25: v1(122.35,42.63) 122.868,43.148 DD2.35
  Top Layer w0.3: v1(122.578,68.906) 121.32,70.164 121.32,115.983 133,127.663 133,137.723 134,138.723 X4.11
  Bottom Layer w0.3: v1(122.35,42.63) 123.62,43.9 123.62,63.89 121.91,65.6 121.91,66.368 122.578,67.035 v1(122.578,68.906)
SPI_MOSI: C31.1 DD2.36 R33.1 | length 7.1
  Top Layer w0.25: R33.1 123.4,41.22 C31.1 123.378,41.302 123.378,47.137 DD2.36
SPI_NSS: C33.1 DD2.33 R35.1 | length 9.1
  Top Layer w0.25: R35.1 C33.1 118.87,41.31 118.87,42.345 119.28,42.755 120.649,42.755 121.868,43.973 DD2.33
SPI_SCK: C32.1 DD2.34 R34.1 | length 7.6
  Top Layer w0.25: C32.1 119.96,41.24 R34.1 121.14,42.609 122.368,43.837 DD2.34
SWD_CLK: DD2.49 X1.5 | length 82.5
  Top Layer w0.25: DD2.49 132.934,48.996 134.872,47.058 140.776,47.058 v1(141.613,46.22)
  Bottom Layer w0.25: X1.5 95.86,46.87 106.7,36.03 134.8,36.03 141.695,42.925 141.695,46.045 v1@141.71,46.06
SWD_IO: DD2.46 X1.3 | length 86.5
  Top Layer w0.25: DD2.46 128.368,44.321 128.859,43.83 132.194,43.83 134.557,46.194 v1(140.248,46.194)
  Bottom Layer w0.25: X1.3 84.35,48.87 85.9,47.32 96.046,47.32 106.886,36.48 134.614,36.48 140.248,42.115 v1(140.248,46.194)
TIM1_CH1_: C6.1 DD2.41 R7.2 | length 8.9
  Top Layer w0.25: DD2.41 125.868,43.972 127.829,42.011 128.748,42.011 128.894,41.865 128.894,41.366 129.07,41.19 C6.1
TIM1_CH1_RAW: ENC2.1 R7.1 | length 147.6
  Top Layer w0.4: 112.1,38.1 113.585,36.615 126.926,36.615 129.06,38.749 R7.1
  Top Layer w0.5: v1(68.349,60.471) 68.349,62.361 66.08,64.63 66.08,111.08 ENC2.1 ; v1@68.463,55.383 69.24,56.16 96.578,56.16 98.668,54.07 102.401,54.07 108.07,48.401 108.07,42.13 112.1,38.1
  Bottom Layer w0.5: v1(68.349,60.471) 68.35,60.47 v1(68.35,55.34)
TIM1_CH2_: C5.1 DD2.42 R9.2 | length 10.7
  Top Layer w0.25: DD2.42 126.368,44.134 128.022,42.48 130.74,42.48 131.31,41.91 C5.1 R9.2
TIM1_CH2_RAW: ENC2.3 R9.1 | length 157.4
  Top Layer w0.4: 111.55,37.66 113.195,36.015 130.055,36.015 132.44,38.401 R9.1
  Top Layer w0.5: v1(69.495,59.851) 69.523,59.879 69.523,62.177 66.78,64.92 66.78,110.79 75.37,119.38 81.5,119.38 82.5,120.38 ENC2.3 ; v1(69.51,54.06) 70.91,55.46 96.288,55.46 98.378,53.37 102.111,53.37 107.37,48.111 107.37,41.84 111.55,37.66
  Bottom Layer w0.5: v1(69.495,59.851) 69.51,59.836 v1(69.51,54.06)
TIM2_CH1_: C4.1 DD2.14 R12.2 | length 4.5
  Top Layer w0.25: C4.1 122.41,61.49 R12.2 122.42,60.121 122.868,59.673 DD2.14
TIM2_CH1_RAW: ENC3.1 R12.1 | length 74.2
  Top Layer w0.3: ENC3.1 105.53,122.53 ENC3.1@105.69,122.69
  Top Layer w0.5: ENC3.1@105.53,122.53 105.53,123.96 105.95,124.38 111.96,124.38 119.714,116.626 119.714,67.42 122.42,64.714 R12.1
TIM2_CH2_: C3.1 DD2.15 R14.2 | length 5.8
  Top Layer w0.25: R14.2 119.025,61.48 C3.1 120.15,60.74 120.5,60.39 121.514,60.39 122.358,59.546 122.358,58.356 DD2.15
TIM2_CH2_RAW: ENC3.3 R14.1 | length 63.2
  Top Layer w0.5: ENC3.3 119.014,113.986 R14.1
TIM3_CH1_: C8.1 DD2.37 R3.2 | length 7.4
  Top Layer w0.25: DD2.37 123.868,42.747 124.56,42.055 R3.2 C8.1
TIM3_CH1_RAW: ENC1.1 R3.1 | length 146.2
  Top Layer w0.4: 113.33,38.87 114.335,37.865 124.057,37.865 124.56,38.368 R3.1
  Top Layer w0.5: ENC1.1 49.5,120.02 50.53,118.99 54.35,118.99 63.32,110.02 64.68,108.66 64.68,63.837 66.183,62.334 v1(66.183,62.249) ; v1(66.172,57.493) 66.238,57.56 97.158,57.56 99.248,55.47 102.981,55.47 109.47,48.981 109.47,42.722 113.322,38.87 113.33,38.87
  Bottom Layer w0.5: v1(66.172,57.493) 66.183,57.504 v1(66.183,62.249)
TIM3_CH2_: C7.1 DD2.38 R5.2 | length 8.9
  Top Layer w0.25: DD2.38 124.368,42.883 125.066,42.185 126.493,42.185 126.78,41.899 126.78,41.27 126.86,41.19 R5.2
TIM3_CH2_RAW: ENC1.3 R5.1 | length 145.8
  Top Layer w0.4: 112.713,38.483 113.98,37.215 126.358,37.215 127.96,38.817 R5.1
  Top Layer w0.5: ENC1.3 54.62,122.38 54.62,119.71 65.38,108.95 65.38,64.34 67.289,62.431 v1(67.289,61.309) ; v1(67.267,56.398) 67.298,56.398 67.759,56.86 96.868,56.86 98.958,54.77 102.691,54.77 108.77,48.691 108.77,42.425 112.713,38.483
  Bottom Layer w0.5: v1(67.267,56.398) 67.267,61.287 v1(67.289,61.309)
VCC3.3V: C1.2 C2.2 C9.2 C17.2 C18.2 C21.2 C23.2 C26.1 C27.1 C28.1 C29.1 C30.1 DD2.1 DD2.13 DD2.19 DD2.32 DD2.48 DD2.64 R1.1 R11.1 R16.1 R17.1 R18.1 R19.1 R21.1 R26.2 R27.2 R28.2 R29.2 R30.2 R31.2 X1.10 X4.1 X4.2 X4.3 X4.4 X4.5 X4.6 | length 465.5
  Top Layer w0.25: C28.1@117.47,55.74 C28.1 117.704,55.506 120.008,55.506 DD2.19 122.924,55.496 123.22,55.2 123.368,55.348 DD2.13 C27.1@123.368,61.64 ; C29.1 117.504,48.18 118.364,48.18 118.51,48.326 118.51,48.81 118.696,48.996 DD2.32 122.016,48.996 122.82,49.8 122.82,49.83 ; 125.735,52.74 128.8,55.805 ; 128.63,50.25 128.63,49.82 129.368,49.082 DD2.48 129.368,45.304 129.604,45.068 C30.1@129.704,45.068 ; 128.74,55.46 128.8,55.52 128.8,55.805 ; DD2.1 129.368,57.018 128.8,56.45 128.8,55.805 ; C26.1 133.42,57.558 133.195,57.333 132.856,57.333 132.71,57.187 132.71,56.643 132.564,56.496 DD2.64 129.975,56.496 129.289,55.81 128.805,55.81 128.8,55.805
  Top Layer w0.3: 136.5,138.21 X4.6 ; X4.5 137,138.5 v1(137.2,138.3) ; 137.44,138.89 137.5,138.95 X4.4 ; 137.98,138.64 138,138.66 X4.3 ; 138.49,138.84 138.5,138.85 X4.2 ; 138.96,138.83 139,138.87 X4.1
  Top Layer w0.4: 127.59,65.02 127.97,65.02 128.487,64.503 168.05,64.503 170.132,62.42 173.274,62.42 173.86,61.834 R29.2 173.872,60.548 173.872,55.997 R31.2 R30.2
  Top Layer w0.5: C21.2 58.98,91.98 R16.1 ; C18.2 58.98,63.98 R17.1 ; C17.2 R1.1 ; C2.2 86.98,92.02 R11.1 ; C9.2 114.95,63.95 R18.1 ; C1.2 114.91,92.09 R19.1 ; C23.2 142.99,91.99 R21.1 ; R26.2 173.857,44.857 173.857,54.845 R30.2
  Top Layer w1: v1@123.952,85.48 123.952,84.12 123.952,74.251 126.89,71.313 126.89,66.83 126.89,65.87 ; v1(123.96,85.48) 123.576,85.864 123.576,115.786 134.68,126.89 134.68,137.3 135.59,138.21 136.5,138.21
  Bottom Layer w1: R17.1 59,49.27 65.4,42.87 X1.10 ; v1(126.06,53.74) 125.631,54.169 125.631,64.235 v1@126.661,65.264
  Bottom Layer w2: R17.1 65.51,70.51 65.51,86.91 ; R16.1 64.09,86.91 65.51,86.91 ; R1.1 90.77,60.23 95.09,60.23 ; R18.1 108.14,64 104.37,60.23 95.09,60.23 ; R21.1 138.126,92 131.106,84.98 125.43,84.98 123.96,84.98 122.02,84.98 R19.1 107.08,92 101.6,86.52 95.14,86.52 ; 65.51,86.91 75.61,86.91 80.7,92 R11.1 92.48,86.52 95.14,86.52 ; 95.09,60.23 95.14,60.28 95.14,86.52
  other v1: 126.07,52.21 126.87,65.3 126.86,66.83 123.96,84.12 125.43,84.16 125.4,85.46 138.8,138.29
VCC5V: C20.2 C24.2 DD1.23 L1.1 X3.4 X3.5 X3.6 X5.1 | length 92.3
  Top Layer w0.25: L1.1 146.756,71.986 150.949,71.986 152.763,73.8 DD1.23
  Top Layer w0.75: X5.1 130.26,67.34 132.209,65.391 165.391,65.391 v1@167.91,67.91 ; C20.2 C20.2@133.57,72.31
  Top Layer w1.5: X5.1 133.47,72.31 C20.2 ; C20.2@133.57,72.31 146.36,72.31 L1.1
  Bottom Layer w0.5: 166.48,57.98 166.5,58 ; X3.6 167.5,57 166.5,58 ; X3.5 166.5,58 ; X3.4 167.5,59 166.5,58
  Bottom Layer w1.5: 166.48,57.98 C24.2 163.23,60.9 168,65.67 v1(168,68)
  other v1: 169.5,68 171,68
pads on no net: DD1.4 DD1.7 DD1.15 DD1.21 DD2.6 DD2.28 DD2.29 DD2.30 DD2.39 DD2.40 DD2.43 DD2.58 DD2.59 ENC1.NU ENC2.NU ENC3.NU R1.NU R11.NU R16.NU R17.NU R18.NU R19.NU R21.NU X1.7 X1.9 X2.7 X2.12 X3.NC X4.7 X4.17 X4.19 X4.nc X5.2 X5.H

## Polygon pours and split planes (outlines as drawn)
GND on Top Layer "GND_L01_P003" (solid, pour order 3): 160.021,39.5 154,39.5 154,44 153.5,44.5 147,44.5 147,51.851 151.387,56.238 159.984,56.238
NetDD1_19 on Top Layer "NETDD1_19_L01_P000" (solid, pour order 0): 150.5,78 152.5,78 152.5,75 150.5,75
GND on Bottom Layer "GND_L02_P004" (solid, pour order 4): 173,37 42.5,37 42.5,143.5 173,143.5 173,119.5 161.5,119.5 161.5,86.8 141,86.8 141,80.7 126.7,80.7 126.7,74.8 173,74.8
GND on Bottom Layer "GND_L02_P002" (solid, pour order 2): 150,76 150,70 150,66 166,66 166,71.5 157,71.5 157,76
PWR_GND on Bottom Layer "PWR_GND_L02_P001" (solid, pour order 1): 157.5,73 157.5,76.5 148.5,76.5 148.5,75.5 127.5,75.5 127.5,80 142,80 142,86 165,86 165,73

## Other copper
Top Layer:
  rectangle net VCC3.3V: 123.028,83.37 126.22,86.51
  rectangle net VCC5V: 167,67 172,69
  rectangle net PWR_GND: 151.369,78.523 153.179,84.153
  rectangle net NetVD1_2: 165.97,87.83 172.56,97.76
  rectangle net VCC3.3V: 125.95,64.56 127.73,67.71
  rectangle net GND: 109.517,57.067 111.347,58.407
  rectangle net GND: 109.517,53.785 111.347,55.125
  rectangle net GND: 109.5,50.49 111.33,51.83
  rectangle net VCC3.3V: 122.41,49.39 129.06,56.09
  rectangle net VCC3.3V: 136.19,137.48 139.42,139.16
  rectangle net GND: 129.3,140.83 135.7,142.51
Bottom Layer:
  rectangle net VCC3.3V: 123.14,83.32 126.2,86.57
  rectangle net VCC5V: 167.09,67.03 171.84,68.93
  rectangle net GND: 157.5,68.5 164.11,71.5
  rectangle net PWR_GND: 158,72.987 164.5,75.5
  rectangle net VCC3.3V: 125.12,51.42 126.9,54.57
  rectangle net VCC3.3V: 125.95,64.56 127.73,67.71
  pour cut-out: 41,44 49,44 49,36 41,36
  pour cut-out: 41,144 49,144 49,136 41,136
  pour cut-out: 91,144 99,144 99,136 91,136
  pour cut-out: 146,144 154,144 154,136 146,136
  pour cut-out: 146,44 154,44 154,36 146,36
  pour cut-out: 91,44 99,44 99,36 91,36

## Silkscreen, mask and mechanical layers (free items; w line width, h text height)
Board:
  the board outline again, w0.254